# Altium PCB LM-008.PcbDoc (part 1 of 2)
Units mm, origin at the board's own origin, x right, y up, seen from the top; angles counter-clockwise.
Board outline 62 x 70.16 mm, 4 copper layers (Top Layer, +5V, Signal Layer 1, Bottom Layer), stack 0.778 mm thick; 50 components, 39 nets, 213 pads, 21 vias.
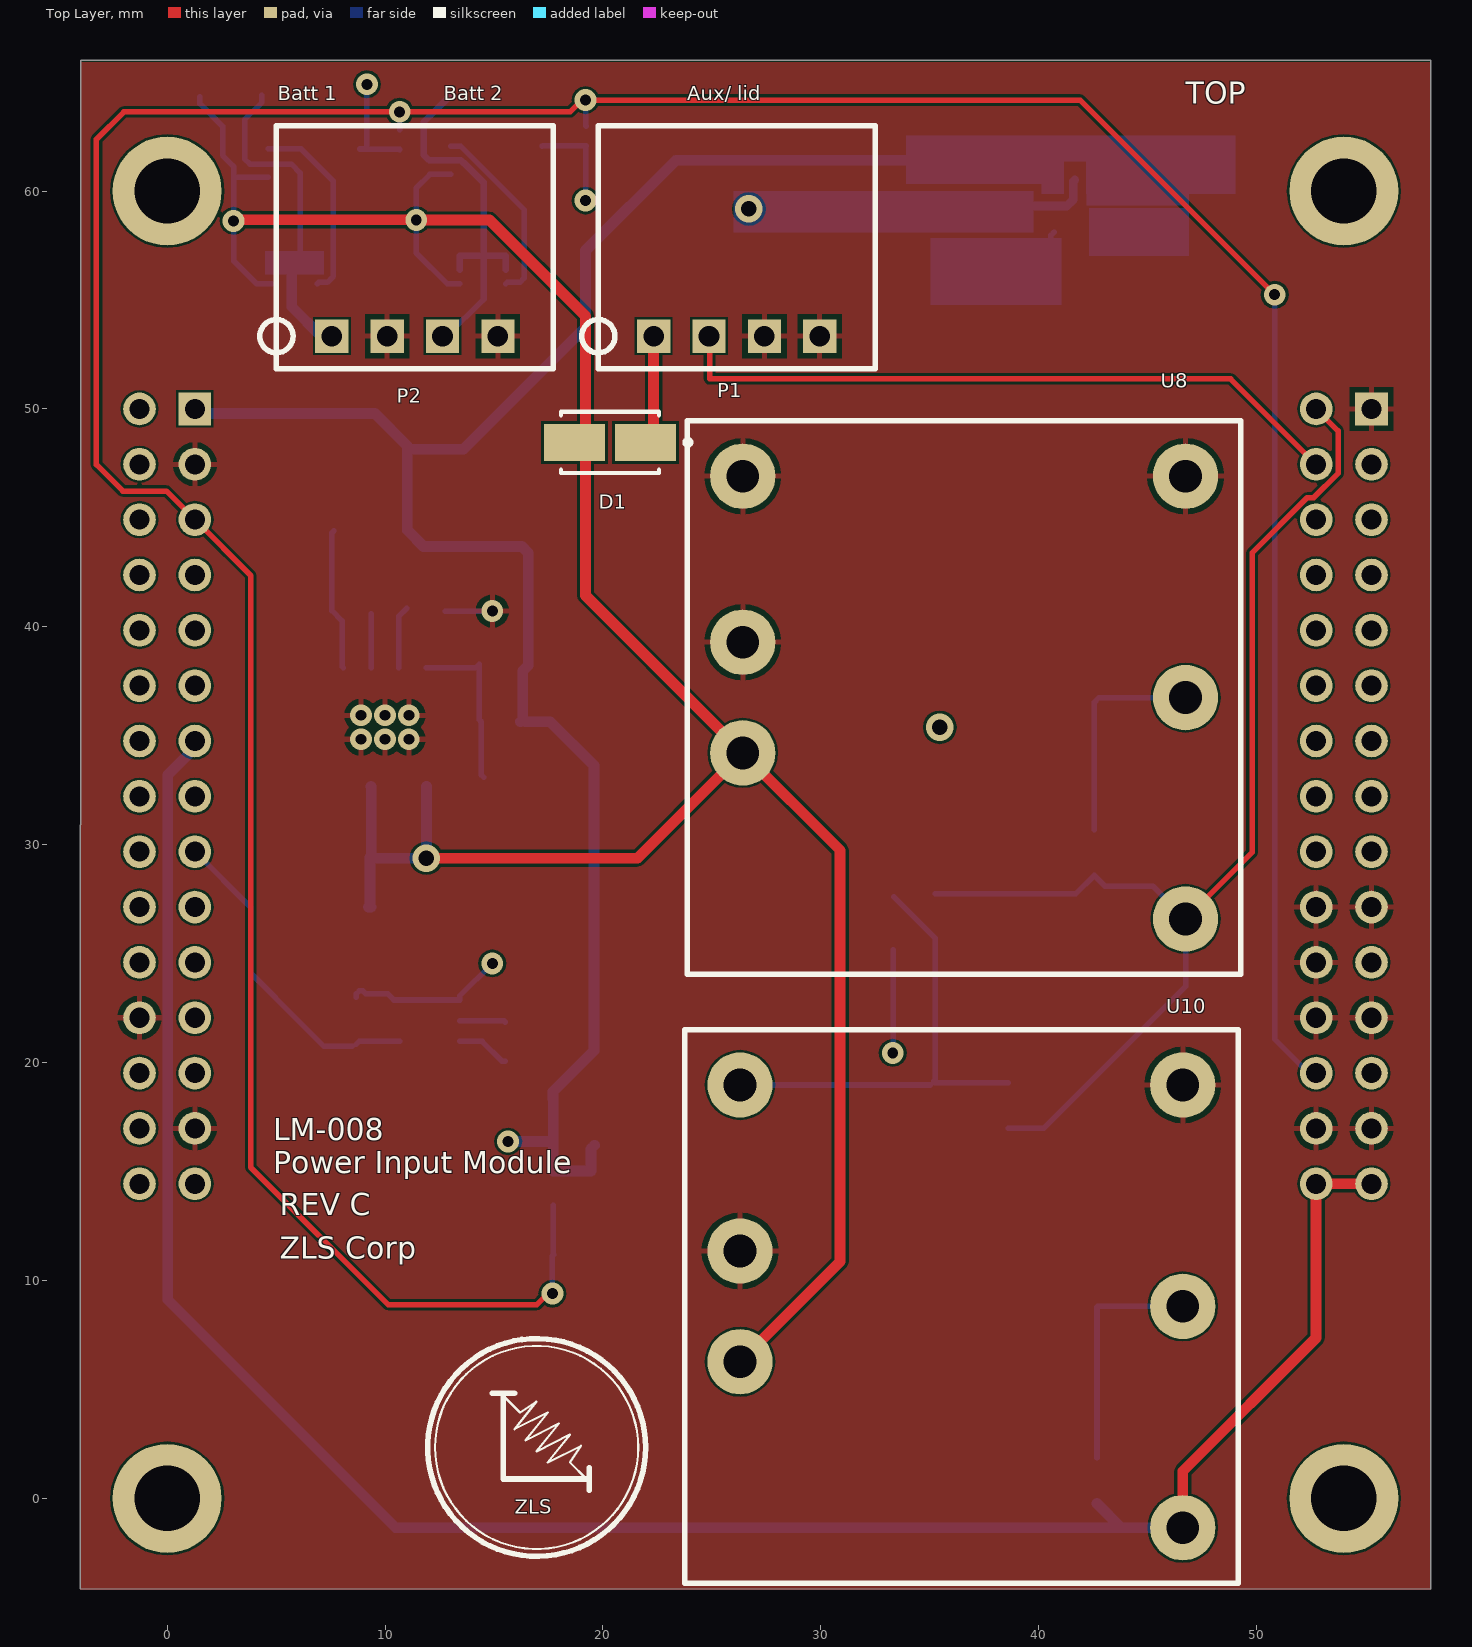
[diagram p0: Top Layer view]
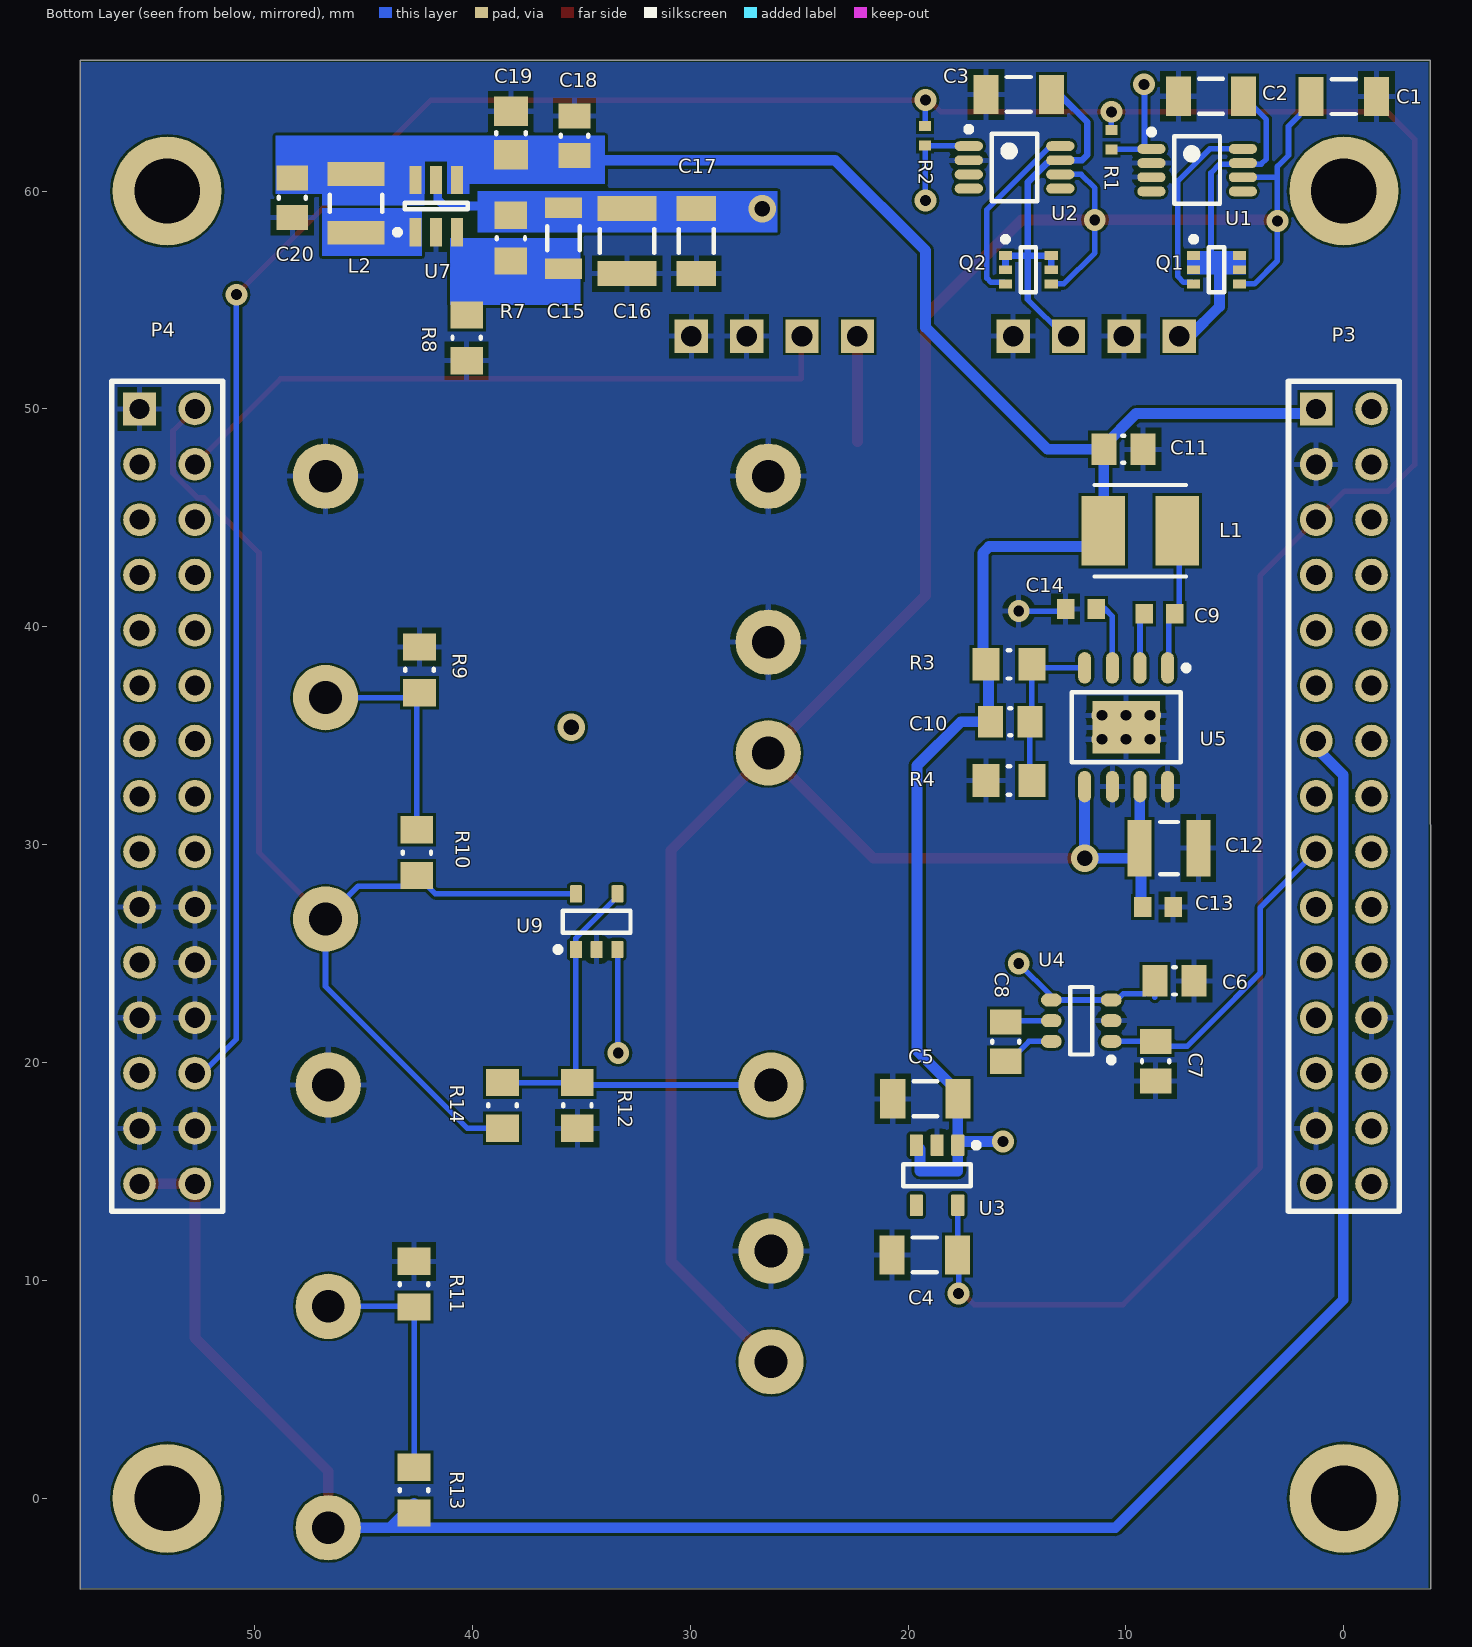
[diagram p1: Bottom Layer view, seen from below]
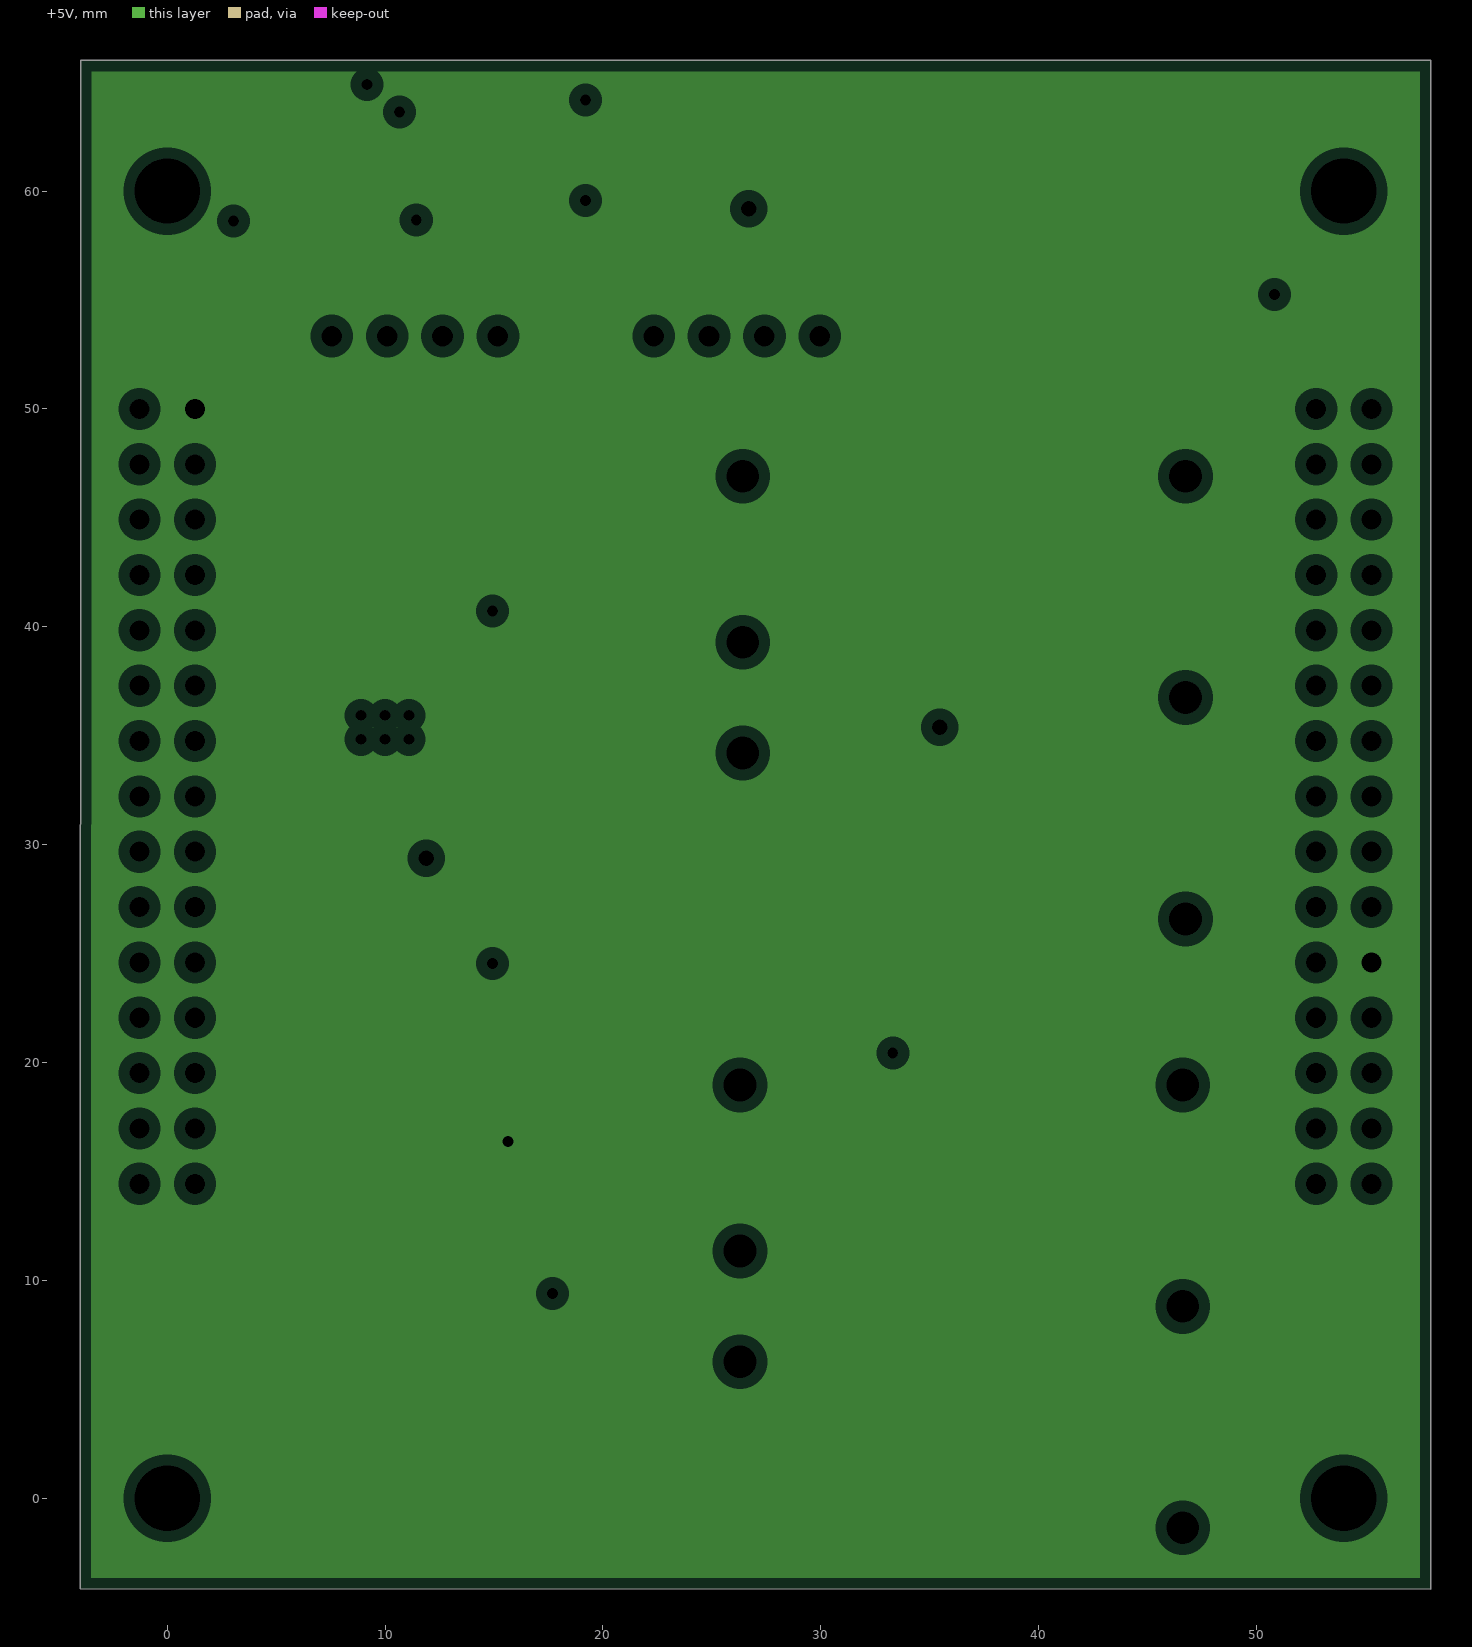
[diagram p2: +5V, clearances drawn from the general rule]
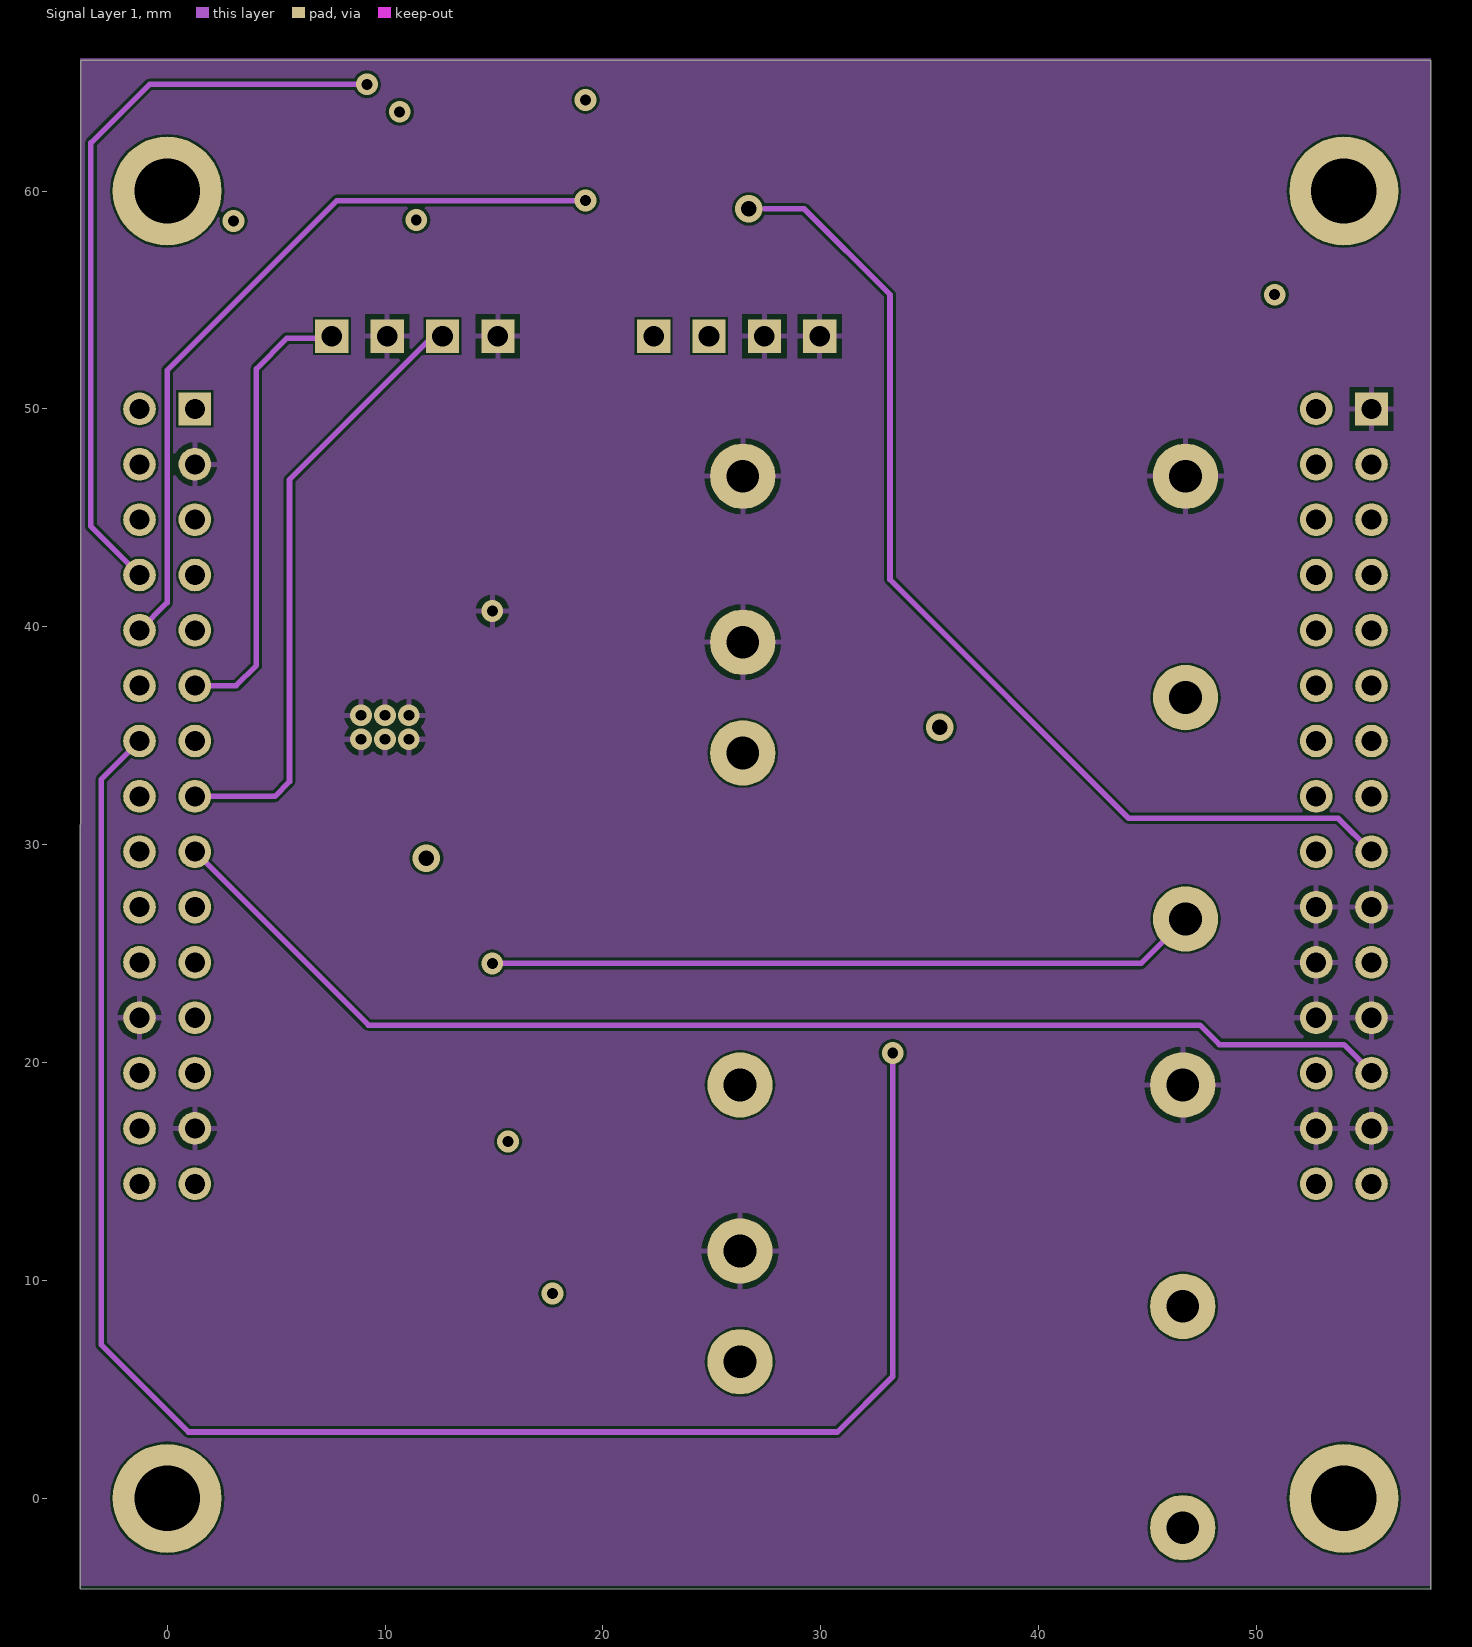
[diagram p3: Signal Layer 1]

## Layer stack, top to bottom
Top Solder: solder mask 0.0102, Solder Resist, Dk 3.5
Top Layer: signal copper 0.0356
Dielectric 1: core 0.254, FR-4, Dk 4.2
+5V: plane copper 0.036, net +5
Dielectric 3: prepreg 0.127, Dk 4.2
Signal Layer 1: signal copper 0.036
Dielectric 2: core 0.254, Dk 4.2
Bottom Layer: signal copper 0.0356
Bottom Solder: solder mask 0.0102, Solder Resist, Dk 3.5

## Board outline
-4,-4.138 58,-4.162 58,66.001 -3.975,65.999

## Design rules (kind name [scope] priority, off if disabled: settings)
Clearance [All] p1: gap=0.127 ignorepadtopadclearanceinfootprint=TRUE except(0.1: Arc-Text Arc-Hole Track-Text Track-Hole SMDPad-SMDPad SMDPad-THPad SMDPad-Via SMDPad-Text SMDPad-Hole THPad-THPad THPad-Via THPad-Fill THPad-Poly THPad-Region THPad-Text THPad-Hole Via-Text Via-Hole Fill-Text Fill-Hole Poly-Text Poly-Hole Region-Text Region-Hole Text-Text Text-Hole)
HoleSize [All] p1: absolutevalues=TRUE maxlimit=5 minlimit=0.025 maxpercent=80.000 minpercent=20.000
MinimumSolderMaskSliver [All] p1: minsoldermaskwidth=0.045
PlaneClearance [All] p1: clearance=0.508
PlaneConnect [All] p1: planeconnectstyle=Relief reliefexpansion=0.508 reliefentries=4 reliefconductorwidth=0.254 reliefairgap=0.254
PolygonConnect [All] p1: connectstyle=Relief reliefconductorwidth=0.254 reliefentries=4 polygonreliefangle="90 Angle" airgapwidth=0.254
RoutingVias [All] p1: holewidth=0.711 width=1.27 viastyle="Through Hole" minholewidth=0.711 minwidth=1.27 maxholewidth=0.711 maxwidth=1.27
SilkToSilkClearance [All] p1: silktosilkclearance=0.2
SilkToSolderMaskClearance [IsPad] p1: minsilkscreentomaskgap=0.175 clearancetoexposedcopper=TRUE
SolderMaskExpansion [All] p1: expansion=0.102
Width [All] p1: maxlimit=1 minlimit=0.254 preferedwidth=0.254
24 further rules are at their usual default settings.

## Classes and differential pairs
component class 36V_Supply: C15 C16 C17 C18 C19 C20 L2 R7 R8 U7
component class 5R_Supply.doc: C6 C7 C8 C9 C10 C11 C12 C13 C14 L1 R3 R4 R28 U4 U5
component class Power_Input: C1 C2 C3 D1 P1 P2 P? Q1 Q2 R1 R2 RL2 RL? U1 U2
component class 12V_Supply: R11 R12 R13 R14 U9 U10
component class BBB-Supply: R9 R10 R26 U8
component class LM-008: C4 C5 P3 P4 U3

## Components (designator, comment, footprint, x,y, rotation, side; value= is the part's Value field where it differs from the comment)
C1 "CAP CER 10UF 6.3V X5R 1206" CAPC1206(3216)130_N 0,64.338 r0 bottom
C2 "CAP CER 10UF 6.3V X5R 1206" CAPC1206(3216)130_N 6.096,64.351 r180 bottom
C3 "CAP CER 10UF 6.3V X5R 1206" CAPC1206(3216)130_N 14.921,64.436 r180 bottom
C4 "CAP CER 1UF 50V X7R 1210" CAPC1206(3216)130_N 19.228,11.176 r180 bottom
C5 "CAP CER 1UF 50V X7R 1210" CAPC1206(3216)130_N 19.202,18.339 r180 bottom
C6 "10uF" CAPC0805(2012)145_N 7.772,23.749 r180 bottom
C7 "10uF" CAPC0805(2012)145_N 8.636,20.062 r270 bottom
C8 "1uF" CAPC0805(2012)145_N 15.518,20.962 r270 bottom
C9 "0.68uF" 1608[0603] 8.455,40.598 r180 bottom
C10 "10pF" CAPC0805(2012)145_N 15.313,35.645 r180 bottom
C11 "10uF" CAPC0805(2012)145_N 10.117,48.149 r180 bottom
C12 "4.7uF" C1210 8.026,29.845 r0 bottom
C13 "0.1uF" 1608[0603] 8.534,27.14 r0 bottom
C14 "2.2uF" 1608[0603] 12.065,40.818 r180 bottom
C15 "22pF" CAPC1206(3216)170_L 35.814,57.836 r90 bottom
C16 "CAP CER 1UF 50V X7R 1210" CAPC1210(3225)100_N 32.893,57.709 r90 bottom
C17 "CAP CER 0.47UF 50V X7R 1206" CAPC1206(3216)190_N 29.718,57.709 r90 bottom
C18 "CAP CER 1UF 16V X7R 0805" CAPC0805(2012)145_N 35.306,62.535 r270 bottom
C19 "4.7uF" CAPC0805(2012)145_M 38.227,62.662 r270 bottom
C20 "CAP CER 0.047UF 16V X7R 0603" CAPC0805(2012)145_N 48.26,59.69 r90 bottom
D1 "CDBA540-HF" VISH-DO-214AC-2_M 20.32,48.463 r180 top
L1 "2.2uH" PA4332 9.344,44.408 r0 bottom
L2 "47uH" C1210 45.339,59.436 r270 bottom
P1 "IPL1-104-01-L-S-RA-K" IPL1-104-01-L-S-RA-K 22.326,53.34 r0 top
P2 "IPL1-104-01-L-S-RA-K" IPL1-104-01-L-S-RA-K 7.555,53.34 r0 top
P3 "SSW-115-01-F-D" SSW-115-23-G-D 1.27,50 r270 bottom locked
P4 "SSW-115-01-F-D" SSW-115-23-G-D 55.27,50 r270 bottom locked
Q1 "MCH6336-TL-E" ONSC-MCPH-6_V 5.842,56.388 r180 bottom
Q2 "MCH6336-TL-E" ONSC-MCPH-6_V 14.478,56.388 r180 bottom
R1 "560k" RESC0402(1005)_L 10.668,62.357 r90 bottom
R2 "560k" RESC0402(1005)_L 19.228,62.535 r90 bottom
R3 "88.7K" RESC0805(2012)_M 15.367,38.278 r0 bottom
R4 "22.1K" RESC0805(2012)_M 15.367,32.944 r180 bottom
R7 "RES SMD 280K OHM 1% 1/8W 0805" RESC0805(2012)_M 38.227,57.836 r270 bottom
R8 "RES SMD 10K OHM 1% 1/8W 0805" RESC0805(2012)_M 40.259,53.264 r270 bottom
R9 "DNP" RESC0805(2012)_M 42.418,38.024 r90 bottom
R10 "DNP" RESC0805(2012)_M 42.545,29.642 r90 bottom
R11 "DNP" RESC0805(2012)_M 42.672,9.83 r90 bottom
R12 "RES SMD 100K OHM 1% 1/8W 0805" RESC0805(2012)_M 35.179,18.034 r270 bottom
R13 "DNP" RESC0805(2012)_M 42.672,0.381 r90 bottom
R14 "DNP" RESC0805(2012)_M 38.608,18.034 r90 bottom
U1 "LTC4414EMS8#TRPBF" LT-MS8-8_L 6.731,60.96 r180 bottom
U2 "LTC4414EMS8#TRPBF" LT-MS8-8_L 15.113,61.087 r180 bottom
U3 "TLV70233DBVR" DBV0005A_N 18.669,14.834 r270 bottom
U4 "LM2776DBVR" LM2776DBVR 12.049,21.924 r0 bottom
U5 "LMR23625CFDDAR" LMR23625CDDAR 9.99,35.391 r270 bottom
U7 "LT3461" LT-S6-6-TSOT-23_N 41.656,59.309 r90 bottom
U8 "CCG152405S" PXB15-24WS05/NT 26.416,46.914 r0 top
U9 "OPA188AIDBVR" DBV0005A_L 34.29,26.467 r90 bottom
U10 "CCG30-24-12S" PXB15-24WD05/N 46.609,8.814 r0 top

## Footprints (in the part's own frame and the unit in brackets; to place one, negate y for a bottom-side part, rotate by r counter-clockwise, add the part's x,y. Pads: shape width x height; smd on the part's side, far side on the other; paste and mask are expansions set on the pad)
1608[0603] [mm] "Chip Capacitor, Body 1.6x0.8mm, IPC High Density"
  rect 0.8x0.9 smd: 1(-0.7,0) 2(0.7,0)
  body extent -0.87,-0.48 0.87,0.48, height 1.3
C1210 [mm] "Chip Capacitor, Body 3.2x2.5mm, IPC High Density"
  rect 1.1x2.6 smd: 1(-1.35,0) 2(1.35,0)
  silkscreen extent -0.4,-1.2 0.4,1.2, body extent -1.7,-1.35 1.7,1.35, height 1.3
CAPC0805(2012)145_M [mm] "Chip Capacitor, Body 2.0x1.2mm, Height 1.45mm, IPC Low Density"
  rect 1.35x1.55 smd: 1(-1,0) 2(1,0)
  silkscreen extent -0.05,-0.68 0.05,0.67, body extent -1.1,-0.72 1.1,0.72, height 1.45
CAPC0805(2012)145_N [mm] "Chip Capacitor, Body 2.0x1.2mm, Height 1.45mm, IPC Medium Density"
  rect 1.15x1.45 smd: 1(-0.9,0) 2(0.9,0)
  silkscreen extent -0.05,-0.62 0.05,0.62, body extent -1.1,-0.72 1.1,0.73, height 1.45
CAPC1206(3216)130_N [mm] "Chip Capacitor, Body 3.2x1.6mm, Height 1.3mm, IPC Medium Density"
  rect 1.15x1.8 smd: 1(-1.5,0) 2(1.5,0)
  silkscreen extent -0.55,-0.8 0.55,0.8, body extent -1.7,-0.9 1.7,0.9, height 1.3
CAPC1206(3216)170_L [mm] "Chip Capacitor, Body 3.2x1.6mm, Height 1.7mm, IPC High Density"
  rect 0.95x1.7 smd: 1(-1.4,0) 2(1.4,0)
  silkscreen extent -0.55,-0.75 0.55,0.75, body extent -1.7,-0.9 1.7,0.9, height 1.7
CAPC1206(3216)190_N [mm] "Chip Capacitor, Body 3.2x1.6mm, Height 1.9mm, IPC Medium Density"
  rect 1.15x1.8 smd: 1(-1.5,0) 2(1.5,0)
  silkscreen extent -0.55,-0.8 0.55,0.8, body extent -1.7,-0.9 1.7,0.9, height 1.9
CAPC1210(3225)100_N [mm] "Chip Capacitor, Body 3.2x2.5mm, Height 1mm, IPC Medium Density"
  rect 1.15x2.7 smd: 1(-1.5,0) 2(1.5,0)
  silkscreen extent -0.55,-1.25 0.55,1.25, body extent -1.7,-1.35 1.7,1.35, height 1
DBV0005A_L [mm] "SOT23, 5-Leads, Body 3.05x1.75mm, Pitch 0.95mm, IPC High Density"
  rrect18% 0.8x0.55 smd: 1(-1.275,0.95) 2(-1.275,0) 3(-1.275,-0.95) 4(1.275,-0.95) 5(1.275,0.95)
  silkscreen extent -1.4,-1.55 0.5,1.9, body extent -1.42,-1.46 1.42,1.46, height 1.08
DBV0005A_N [mm] "SOT23, 5-Leads, Body 3.05x1.75mm, Pitch 0.95mm, IPC Medium Density"
  rrect17% 1x0.6 smd: 1(-1.375,0.95) 2(-1.375,0) 3(-1.375,-0.95) 4(1.375,-0.95) 5(1.375,0.95)
  silkscreen extent -1.5,-1.55 0.5,1.92, body extent -1.42,-1.46 1.42,1.46, height 1.08
IPL1-104-01-L-S-RA-K [mil]
  rect 60x60 hole 37.4: 1(0,0) 2(100,0) 3(200,0) 4(300,0)
  silkscreen extent -130,-59 400,380, body extent -80,-12 380,380, height 258
LM2776DBVR [mm]
  oval 0.95x0.6 smd: 1(-1.375,0.95) 2(-1.375,0) 3(-1.375,-0.95) 4(1.375,-0.95) 5(1.375,0) 6(1.375,0.95)
  silkscreen extent -1.5,-1.55 0.5,1.92, body extent -1.39,-1.55 1.39,1.55, height 1.45
LMR23625CDDAR [mm] "IC REG BUCK ADJ 2.5A SYNC 8SOPWR"
  oval 1.45x0.6 smd: 1(-2.725,1.905) 2(-2.725,0.635) 3(-2.725,-0.635) 4(-2.725,-1.905) 5(2.725,-1.905) 6(2.725,-0.635) 7(2.725,0.635) 8(2.725,1.905)
  rect 2.4x3.1 smd: 9(0,0)
  silkscreen extent -2.85,-2.5 1.6,2.88, body extent -3,-2.5 3,2.5, height 1.7
LT-MS8-8_L [mm] "SOP, 8-Leads, Body 3.1x3.1mm, Pitch 0.65mm, IPC High Density"
  oval 1.3x0.45 smd: 1(-2.1,0.975) 2(-2.1,0.325) 3(-2.1,-0.325) 4(-2.1,-0.975) 5(2.1,-0.975) 6(2.1,-0.325) 7(2.1,0.325) 8(2.1,0.975)
  silkscreen extent -2.23,-1.55 1.05,1.87, body extent -1.55,-1.55 1.55,1.55, height 1.1
LT-S6-6-TSOT-23_N [mm] "SOT23, 6-Leads, Body 2.9x1.75mm, Pitch 0.95mm, IPC Medium Density"
  rect 1.3x0.55 smd: 1(-1.2,0.95) 2(-1.2,0) 3(-1.2,-0.95) 4(1.2,-0.95) 5(1.2,0) 6(1.2,0.95)
  silkscreen extent -1.32,-1.45 0.15,1.9, body extent -0.87,-1.45 0.87,1.45, height 1
ONSC-MCPH-6_V [mm] "SOT23, 6-Leads, Body 2x1.6mm, Pitch 0.65mm"
  rect 0.6x0.4 smd: 1(-1.05,0.65) 2(-1.05,0) 3(-1.05,-0.65) 4(1.05,-0.65) 5(1.05,0) 6(1.05,0.65)
  silkscreen extent -1.18,-1.03 0.35,1.52, body extent -0.8,-1 0.8,1, height 0.9
PA4332 [mm] "Precision Wire Wound Inductor, 2-Leads, Body 4.10x3.65mm, IPC Medium Density"
  rect 2x3.2 smd: 1(-1.7,0) 2(1.7,0)
  silkscreen extent -2.1,-2.1 2.1,2.1, body extent -2.15,-1.83 2.15,1.82, height 2.1
PXB15-24WD05/N [mm] "DC-DC CONV 15W DUAL 5V"
  round 3 hole 1.5: 1(-20.32,10.16) 2(-20.32,2.54) 3(-20.32,-2.54) 4(0,-10.16) 5(0,0) 6(0,10.16)
  silkscreen extent -22.86,-12.7 2.54,12.7, body extent -22.99,-12.83 2.67,12.83, height 9.9
PXB15-24WS05/NT [mm] "DC-DC Converter 5V 3A 15W"
  round 3 hole 1.5: 1(0,0) 2(0,-7.62) 3(0,-12.7) 4(20.32,-20.32) 5(20.32,-10.16) 6(20.32,0)
  silkscreen extent -2.54,-22.86 22.86,2.54, body extent -2.67,-22.99 22.99,2.67, height 9.9
RESC0402(1005)_L [mm] "Chip Resistor, Body 1.0x0.5mm, IPC High Density"
  rect 0.45x0.55 smd: 1(-0.45,0) 2(0.45,0)
  body extent -0.52,-0.27 0.53,0.28, height 0.4
RESC0805(2012)_M [mm] "Chip Resistor, Body 2.0x1.3mm, IPC Low Density"
  rect 1.25x1.5 smd: 1(-1.05,0) 2(1.05,0)
  silkscreen extent -0.05,-0.65 0.05,0.65, body extent -1.1,-0.67 1.1,0.67, height 0.7
SSW-115-23-G-D [mm]
  rect 1.5x1.5 hole 0.92: 1(0,0)
  round 1.5 hole 0.92: 2(0,2.54) 3(2.54,0) 4(2.54,2.54) 5(5.08,0) 6(5.08,2.54) 7(7.62,0) 8(7.62,2.54) 9(10.16,0) 10(10.16,2.54) 11(12.7,0) 12(12.7,2.54) 13(15.24,0) 14(15.24,2.54) 15(17.78,0) 16(17.78,2.54) 17(20.32,0) 18(20.32,2.54) 19(22.86,0) 20(22.86,2.54) 21(25.4,0) 22(25.4,2.54) 23(27.94,0) 24(27.94,2.54) 25(30.48,0) 26(30.48,2.54) 27(33.02,0) 28(33.02,2.54) 29(35.56,0) 30(35.56,2.54)
  silkscreen extent -1.27,-1.27 36.83,3.81, body extent -1.52,-1.27 37.08,3.68, height 8.51
VISH-DO-214AC-2_M [mm] "DO-214AC, 2-Leads, Body 4.5x2.79mm, IPC Low Density"
  rect 2.8x1.7 smd: 1(-1.625,0) 2(1.625,0)
  silkscreen extent -3.7,-1.4 2.25,1.4, body extent -2.25,-1.39 2.25,1.4, height 2.29

## Part data
C1: library part CMP-1037-04913-1, Capacitance=22pF, Manufacturer="Taiyo Yuden", Manufacturer Part Number=JMK316BJ106ML-T, Operating Temperature="-55°C ~ 85°C", Package / Case="1206 (3216 Metric)", Ratings=-, Supplier Part Number 1=587-5447-1-ND, Temperature Coefficient=X5R, Tolerance=±20%, Voltage - Rated=6.3V, Applications="SMPS Filtering", Category=Capacitors, ComponentLink1Description=http://ds.yuden.co.jp/TYCOMPAS/ut/detail.do?productNo=JMK316BJ106ML-T&fileName=JMK316BJ106ML-T_SS&mode=specSheetDownload, ComponentLink1URL=http://ds.yuden.co.jp/TYCOMPAS/ut/detail.do?productNo=JMK316BJ106ML-T&fileName=JMK316BJ106ML-T_SS&mode=specSheetDownload, Failure Rate=-, Features=-, Height - Seated (Max)=-, Lead Spacing=-, Lead Style=-, Mounting Type="Surface Mount, MLCC", Notification="Current market demand for these product types have resulted in fluctuating and extending lead times. Lead times may differ.", Packaging="Cut Tape (CT)", Part Status=Active, Pricing 1="1=0.24, 10=0.161, 100=0.0817, 500=0.05592, 1000=0.04946 (USD)", RoHS="RoHS Compliant", Size / Dimension="0.126\" L x 0.063\" W (3.20mm x 1.60mm)", Stock 1=5600, Supplier 1=Digi-Key, Thickness (Max)="0.071\" (1.80mm)"
C2 C3: library part CMP-1037-04913-1, Capacitance=.1uF, Manufacturer="Taiyo Yuden", Manufacturer Part Number=JMK316BJ106ML-T, Operating Temperature="-55°C ~ 85°C", Package / Case="1206 (3216 Metric)", Ratings=-, Supplier Part Number 1=587-5447-1-ND, Temperature Coefficient=X5R, Tolerance=±20%, Voltage - Rated=6.3V, Applications="SMPS Filtering", Category=Capacitors, ComponentLink1Description=http://ds.yuden.co.jp/TYCOMPAS/ut/detail.do?productNo=JMK316BJ106ML-T&fileName=JMK316BJ106ML-T_SS&mode=specSheetDownload, ComponentLink1URL=http://ds.yuden.co.jp/TYCOMPAS/ut/detail.do?productNo=JMK316BJ106ML-T&fileName=JMK316BJ106ML-T_SS&mode=specSheetDownload, Failure Rate=-, Features=-, Height - Seated (Max)=-, Lead Spacing=-, Lead Style=-, Mounting Type="Surface Mount, MLCC", Notification="Current market demand for these product types have resulted in fluctuating and extending lead times. Lead times may differ.", Packaging="Cut Tape (CT)", Part Status=Active, Pricing 1="1=0.24, 10=0.161, 100=0.0817, 500=0.05592, 1000=0.04946 (USD)", RoHS="RoHS Compliant", Size / Dimension="0.126\" L x 0.063\" W (3.20mm x 1.60mm)", Stock 1=5600, Supplier 1=Digi-Key, Thickness (Max)="0.071\" (1.80mm)"
C4 C5: library part CMP-1037-04913-1, Capacitance=1µF, Manufacturer="Murata Electronics North America", Manufacturer Part Number=GRM32RR71H105KA01L, Operating Temperature="-55°C ~ 125°C", Package / Case="1210 (3225 Metric)", Ratings=-, Supplier Part Number 1=490-1863-6-ND, Temperature Coefficient=X7R, Tolerance=±10%, Voltage - Rated=50V, Applications="General Purpose", Category=Capacitors, ComponentLink1Description=http://search.murata.co.jp/Ceramy/image/img/A01X/G101/ENG/GRM32RR71H105KA01-01.pdf, ComponentLink1URL=http://search.murata.co.jp/Ceramy/image/img/A01X/G101/ENG/GRM32RR71H105KA01-01.pdf, Features=-, Height - Seated (Max)=-, Lead Spacing=-, Lead Style=-, Mounting Type="Surface Mount, MLCC", Packaging=Digi-Reel®, Part Status=Active, Pricing 1="1=0.35, 10=0.242, 100=0.1449, 500=0.10868 (USD)", RoHS="RoHS Compliant", Size / Dimension="0.126\" L x 0.098\" W (3.20mm x 2.50mm)", Stock 1=66890, Supplier 1=Digi-Key, Thickness (Max)="0.079\" (2.00mm)"
C6 C7 C11: library part CMP-1036-04795-1, "CAP CER 10UF 16V X6S 0805", Manufacturer="TDK Corporation", Manufacturer Part Number=C2012X6S1C106K085AC, Operating Temperature="-55°C ~ 105°C", Package / Case="0805 (2012 Metric)", Ratings=-, Supplier Part Number 1=445-14483-6-ND, Temperature Coefficient=X6S, Tolerance=±10%, Voltage - Rated=16V, Applications="General Purpose", Category=Capacitors, ComponentLink1Description=https://product.tdk.com/info/en/catalog/datasheets/mlcc_commercial_general_en.pdf, ComponentLink1URL=https://product.tdk.com/info/en/catalog/datasheets/mlcc_commercial_general_en.pdf, Failure Rate=-, Features="Low ESL", Height - Seated (Max)=-, Lead Spacing=-, Lead Style=-, Mounting Type="Surface Mount, MLCC", Notification="Current market demand for these product types have resulted in fluctuating and extending lead times. Lead times may differ.", Packaging=Digi-Reel®, Part Status=Active, Pricing 1="1=0.38, 10=0.259, 100=0.1466, 500=0.1035, 1000=0.09056 (USD)", RoHS="RoHS Compliant", Size / Dimension="0.079\" L x 0.049\" W (2.00mm x 1.25mm)", Stock 1=0, Supplier 1=Digi-Key, Thickness (Max)="0.039\" (1.00mm)"
C8: library part CMP-1036-04795-1, "CAP CER 1UF 25V X7R 0805", Manufacturer=Yageo, Manufacturer Part Number=CC0805KKX7R6BB105, Operating Temperature="-55°C ~ 125°C", Package / Case="0805 (2012 Metric)", Ratings=-, Supplier Part Number 1=311-1458-6-ND, Temperature Coefficient=X7R, Tolerance=±10%, Voltage - Rated=10V, Applications="General Purpose", Category=Capacitors, ComponentLink1Description=http://www.yageo.com/documents/recent/UPY-GPHC_X7R_6.3V-to-50V_18.pdf, ComponentLink1URL=http://www.yageo.com/documents/recent/UPY-GPHC_X7R_6.3V-to-50V_18.pdf, Failure Rate=-, Features=-, Height - Seated (Max)=-, Lead Spacing=-, Lead Style=-, Mounting Type="Surface Mount, MLCC", Notification="Current market demand for these product types have resulted in fluctuating and extending lead times. Lead times may differ.", Packaging=Digi-Reel®, Part Status=Active, Pricing 1="1=0.25, 10=0.168, 100=0.0852, 500=0.0583, 1000=0.05158 (USD)", RoHS="RoHS Compliant", Size / Dimension="0.079\" L x 0.049\" W (2.00mm x 1.25mm)", Stock 1=30000, Supplier 1=Digi-Key, Thickness (Max)="0.057\" (1.45mm)"
C9: library part "Cap Semi", "CAP CER 0.68UF 50V X5R 0603", Manufacturer="TDK Corporation", Manufacturer Part Number=C1608X5R1H684K080AB, Operating Temperature="-55°C ~ 85°C", Package / Case="0603 (1608 Metric)", Ratings=-, Supplier Part Number 1=445-7466-6-ND, Temperature Coefficient=X5R, Tolerance=±10%, Voltage - Rated=50V, Applications="General Purpose", Category=Capacitors, ComponentLink1Description=https://product.tdk.com/info/en/catalog/datasheets/mlcc_commercial_general_en.pdf, ComponentLink1URL=https://product.tdk.com/info/en/catalog/datasheets/mlcc_commercial_general_en.pdf, Failure Rate=-, Features="Low ESL", Height - Seated (Max)=-, Lead Spacing=-, Lead Style=-, Mounting Type="Surface Mount, MLCC", Notification="Current market demand for these product types have resulted in fluctuating and extending lead times. Lead times may differ.", Packaging=Digi-Reel®, Part Status="Not For New Designs", Pricing 1="1=0.24, 10=0.162, 100=0.0819, 500=0.05606, 1000=0.04959 (USD)", RoHS="RoHS Compliant", Size / Dimension="0.063\" L x 0.032\" W (1.60mm x 0.80mm)", Stock 1=40000, Supplier 1=Digi-Key, Thickness (Max)="0.035\" (0.90mm)"
C10: library part CMP-1036-04795-1, "CAP CER 10PF 16V C0G/NP0 0805", Manufacturer=KEMET, Manufacturer Part Number=C0805C100M4GACTU, Operating Temperature="-55°C ~ 125°C", Package / Case="0805 (2012 Metric)", Ratings=-, Supplier Part Number 1=399-9147-6-ND, Temperature Coefficient="C0G, NP0", Tolerance=±20%, Voltage - Rated=16V, Applications="General Purpose", Category=Capacitors, ComponentLink1Description=https://api.kemet.com/component-edge/download/datasheet/C0805C100M4GACTU.pdf, ComponentLink1URL=https://api.kemet.com/component-edge/download/datasheet/C0805C100M4GACTU.pdf, Failure Rate=-, Features="Low ESL", Height - Seated (Max)=-, Lead Spacing=-, Lead Style=-, Mounting Type="Surface Mount, MLCC", Notification="Current market demand for these product types have resulted in fluctuating and extending lead times. Lead times may differ.", Packaging=Digi-Reel®, Part Status=Active, Pricing 1="1=0.13, 10=0.092, 100=0.0409, 500=0.02918, 1000=0.02293 (USD)", RoHS="RoHS Compliant", Size / Dimension="0.079\" L x 0.049\" W (2.00mm x 1.25mm)", Stock 1=7637, Supplier 1=Digi-Key, Thickness (Max)="0.035\" (0.88mm)"
C12: library part "Cap Semi", "CAP CER 4.7UF 50V X7R 1210", Manufacturer="Murata Electronics North America", Manufacturer Part Number=GRM32ER71H475KA88L, Operating Temperature="-55°C ~ 125°C", Package / Case="1210 (3225 Metric)", Ratings=-, Supplier Part Number 1=490-1864-6-ND, Temperature Coefficient=X7R, Tolerance=±10%, Voltage - Rated=50V, Applications="General Purpose", Category=Capacitors, ComponentLink1Description=https://www.murata.com/~/media/webrenewal/support/library/catalog/products/capacitor/mlcc/c02e.ashx?la=en-us, ComponentLink1URL=https://www.murata.com/~/media/webrenewal/support/library/catalog/products/capacitor/mlcc/c02e.ashx?la=en-us, Features=-, Height - Seated (Max)=-, LatestRevisionDate=29-May-2009, LatestRevisionNote="IPC-7351 Footprint Added.", Lead Spacing=-, Lead Style=-, Mounting Type="Surface Mount, MLCC", Notification="Current market demand for these product types have resulted in fluctuating and extending lead times. Lead times may differ.", PackageDescription="Chip Capacitor", PackageReference=C1206, Packaging=Digi-Reel®, Part Status="Not For New Designs", Pricing 1="1=1.66, 10=1.313, 100=0.9849, 500=0.74414 (USD)", Published=8-Jun-2000, Publisher="Altium Limited", RoHS="RoHS Compliant", Size / Dimension="0.126\" L x 0.098\" W (3.20mm x 2.50mm)", Stock 1=10000, Supplier 1=Digi-Key, Thickness (Max)="0.106\" (2.70mm)"
C13: library part "Cap Semi", "CAP CER 0.1UF 50V X5R 0603", Manufacturer="TDK Corporation", Manufacturer Part Number=C1608X5R1H104K080AA, Operating Temperature="-55°C ~ 85°C", Package / Case="0603 (1608 Metric)", Ratings=-, Supplier Part Number 1=445-7456-6-ND, Temperature Coefficient=X5R, Tolerance=±10%, Voltage - Rated=50V, Applications="General Purpose", Category=Capacitors, ComponentLink1Description=https://product.tdk.com/info/en/catalog/datasheets/mlcc_commercial_general_en.pdf, ComponentLink1URL=https://product.tdk.com/info/en/catalog/datasheets/mlcc_commercial_general_en.pdf, Failure Rate=-, Features="Low ESL", Height - Seated (Max)=-, Lead Spacing=-, Lead Style=-, Mounting Type="Surface Mount, MLCC", Notification="Current market demand for these product types have resulted in fluctuating and extending lead times. Lead times may differ.", Packaging=Digi-Reel®, Part Status="Not For New Designs", Pricing 1="1=0.1, 10=0.074, 100=0.0331, 500=0.02366, 1000=0.0186 (USD)", RoHS="RoHS Compliant", Size / Dimension="0.063\" L x 0.032\" W (1.60mm x 0.80mm)", Stock 1=0, Supplier 1=Digi-Key, Thickness (Max)="0.035\" (0.90mm)"
C14: library part "Cap Semi", "CAP CER 2.2UF 10V X7R 0603"
C15: library part CMP-1037-04573-1, "CAP CER 22PF 50V C0G/NP0 1206", Manufacturer=KEMET, Manufacturer Part Number=C1206C220K5GACTU, Operating Temperature="-55°C ~ 125°C", Package / Case="1206 (3216 Metric)", Ratings=-, Supplier Part Number 1=399-8165-1-ND, Temperature Coefficient="C0G, NP0", Tolerance=±10%, Voltage - Rated=50V, Applications="General Purpose", Category=Capacitors, ComponentLink1Description=http://www.kemet.com/docfinder?Partnumber=C1206C220K2GACTU, ComponentLink1URL=http://www.kemet.com/docfinder?Partnumber=C1206C220K2GACTU, Failure Rate=-, Features="Low ESL", Height - Seated (Max)=-, Lead Spacing=-, Lead Style=-, Mounting Type="Surface Mount, MLCC", Packaging="Cut Tape (CT)", Part Status=Active, Pricing 1="1=0.18, 10=0.128, 100=0.06, 500=0.04208, 1000=0.03483 (USD)", RoHS="RoHS Compliant", Size / Dimension="0.126\" L x 0.063\" W (3.20mm x 1.60mm)", Stock 1=35613, Supplier 1=Digi-Key, Thickness (Max)="0.035\" (0.88mm)"
C16: library part CMP-1038-01123-1, Capacitance=1µF, Manufacturer="Taiyo Yuden", Manufacturer Part Number=UMK325B7105KH-T, Operating Temperature="-55°C ~ 125°C", Package / Case="1210 (3225 Metric)", Ratings=-, Supplier Part Number 1=587-1366-1-ND, Temperature Coefficient=X7R, Tolerance=±10%, Voltage - Rated=50V, Applications="General Purpose", Category=Capacitors, ComponentLink1Description=http://www.yuden.co.jp/productdata/catalog/en/mlcc_all_e.pdf, ComponentLink1URL=http://www.yuden.co.jp/productdata/catalog/en/mlcc_all_e.pdf, Features=-, Height - Seated (Max)=-, Lead Spacing=-, Lead Style=-, Mounting Type="Surface Mount, MLCC", Packaging="Cut Tape (CT)", Part Status=Active, Pricing 1="1=0.36, 10=0.247, 100=0.1398, 500=0.0987, 1000=0.08637 (USD)", RoHS="RoHS Compliant", Size / Dimension="0.126\" L x 0.098\" W (3.20mm x 2.50mm)", Stock 1=23864, Supplier 1=Digi-Key, Thickness (Max)="0.063\" (1.60mm)"
C17: library part CMP-1037-04570-1, Capacitance=0.47µF, Manufacturer="Taiyo Yuden", Manufacturer Part Number=UMK316B7474KL-T, Operating Temperature="-55°C ~ 125°C", Package / Case="1206 (3216 Metric)", Ratings=-, Supplier Part Number 1=587-1325-1-ND, Temperature Coefficient=X7R, Tolerance=±10%, Voltage - Rated=50V, Applications="General Purpose", Category=Capacitors, ComponentLink1Description=http://www.yuden.co.jp/productdata/catalog/en/mlcc_all_e.pdf, ComponentLink1URL=http://www.yuden.co.jp/productdata/catalog/en/mlcc_all_e.pdf, Features=-, Height - Seated (Max)=-, Lead Spacing=-, Lead Style=-, Mounting Type="Surface Mount, MLCC", Packaging="Cut Tape (CT)", Part Status=Active, Pricing 1="1=0.3, 10=0.203, 100=0.115, 500=0.08114, 1000=0.071 (USD)", RoHS="RoHS Compliant", Size / Dimension="0.126\" L x 0.063\" W (3.20mm x 1.60mm)", Stock 1=8658, Supplier 1=Digi-Key, Thickness (Max)="0.071\" (1.80mm)"
C18: library part CMP-1036-04795-1, Capacitance=1µF, Manufacturer="Taiyo Yuden", Manufacturer Part Number=EMK212B7105KG-T, Operating Temperature="-55°C ~ 125°C", Package / Case="0805 (2012 Metric)", Ratings=-, Supplier Part Number 1=587-1283-1-ND, Temperature Coefficient=X7R, Tolerance=±10%, Voltage - Rated=16V, Applications="General Purpose", Category=Capacitors, ComponentLink1Description=http://ds.yuden.co.jp/TYCOMPAS/ut/detail.do?productNo=EMK212B7105KG-T&fileName=EMK212B7105KG-T_SS&mode=specSheetDownload, ComponentLink1URL=http://ds.yuden.co.jp/TYCOMPAS/ut/detail.do?productNo=EMK212B7105KG-T&fileName=EMK212B7105KG-T_SS&mode=specSheetDownload, Features=-, Height - Seated (Max)=-, Lead Spacing=-, Lead Style=-, Mounting Type="Surface Mount, MLCC", Packaging="Cut Tape (CT)", Part Status=Active, Pricing 1="1=0.13, 10=0.089, 100=0.042, 1000=0.02439 (USD)", RoHS="RoHS Compliant", Size / Dimension="0.079\" L x 0.049\" W (2.00mm x 1.25mm)", Stock 1=41495, Supplier 1=Digi-Key, Thickness (Max)="0.053\" (1.35mm)"
C19: library part CMP-1036-04750-1, "CAP CER 4.7UF 16V X7R 0805", Manufacturer=KEMET, Manufacturer Part Number=C0805C475K4RACTU, Operating Temperature="-55°C ~ 125°C", Package / Case="0805 (2012 Metric)", Ratings=-, Supplier Part Number 1=399-7415-1-ND, Temperature Coefficient=X7R, Tolerance=±10%, Voltage - Rated=16V, Applications="General Purpose", Category=Capacitors, ComponentLink1Description=http://www.kemet.com/docfinder?Partnumber=C0805C475K4RACTU, ComponentLink1URL=http://www.kemet.com/docfinder?Partnumber=C0805C475K4RACTU, Failure Rate=-, Features="Low ESL", Height - Seated (Max)=-, Lead Spacing=-, Lead Style=-, Mounting Type="Surface Mount, MLCC", Packaging="Cut Tape (CT)", Part Status=Active, Pricing 1="1=0.26, 10=0.176, 100=0.0894, 500=0.06118, 1000=0.05412 (USD)", RoHS="RoHS Compliant", Size / Dimension="0.079\" L x 0.049\" W (2.00mm x 1.25mm)", Stock 1=88820, Supplier 1=Digi-Key, Thickness (Max)="0.055\" (1.40mm)"
C20: library part CMP-1036-04795-1, Capacitance=0.047µF, Manufacturer="Murata Electronics North America", Manufacturer Part Number=GRM188R71C473KA01D, Operating Temperature="-55°C ~ 125°C", Package / Case="0603 (1608 Metric)", Ratings=-, Supplier Part Number 1=490-1529-6-ND, Temperature Coefficient=X7R, Tolerance=±10%, Voltage - Rated=16V, Applications="General Purpose", Category=Capacitors, ComponentLink1Description=http://www.murata.com/~/media/webrenewal/support/library/catalog/products/capacitor/mlcc/c02e.ashx, ComponentLink1URL=http://www.murata.com/~/media/webrenewal/support/library/catalog/products/capacitor/mlcc/c02e.ashx, Features=-, Height - Seated (Max)=-, Lead Spacing=-, Lead Style=-, Mounting Type="Surface Mount, MLCC", Packaging=Digi-Reel®, Part Status=Active, Pricing 1="1=0.1, 10=0.046, 100=0.0206, 500=0.0147, 1000=0.01155 (USD)", RoHS="RoHS Compliant", Size / Dimension="0.063\" L x 0.031\" W (1.60mm x 0.80mm)", Stock 1=26, Supplier 1=Digi-Key, Thickness (Max)="0.035\" (0.90mm)"
D1: library part "D Schottky", "DIODE SCHOTTKY 40V 5A DO214AB", Capacitance @ Vr, F="380pF @ 4V, 1MHz", Current - Average Rectified (Io)=5A, Manufacturer="Comchip Technology", Operating Temperature - Junction="-50°C ~ 150°C", Package / Case="DO-214AC, SMA", Supplier Device Package="DO-214AC (SMA)", Supplier Part Number 1=641-1707-6-ND, Category="Discrete Semiconductor Products", ComponentLink1Description=http://www.comchiptech.com/cms/UserFiles/CDBA540-HF%20Thru505315.%20CDBA5200-HF%20RevC.pdf, ComponentLink1URL=http://www.comchiptech.com/cms/UserFiles/CDBA540-HF%20Thru505315.%20CDBA5200-HF%20RevC.pdf, Diode Type=Schottky, Manufacturer Part Number=CDBA540-HF, Mounting Type="Surface Mount", Packaging=Digi-Reel®, Part Status=Active, Pricing 1="1=0.49, 10=0.381, 25=0.3208, 100=0.2612, 250=0.2164, 500=0.1791, 1000=0.13432, 2500=0.12313 (USD)", RoHS="RoHS Compliant", Speed="Fast Recovery =< 500ns, > 200mA (Io)", Stock 1=7367, Supplier 1=Digi-Key
L1: library part Inductor, "FIXED IND 2.2UH 4.3A 48 MOHM SMD", Current - Saturation=6.1A, DC Resistance (DCR)="48 mOhm Max", Frequency - Self Resonant=25MHz, Manufacturer="Pulse Electronics Power", Manufacturer Part Number=PA4332.222NLT, Operating Temperature="-40°C ~ 125°C", Package / Case=Nonstandard, Q @ Freq=-, Supplier Part Number 1=553-3290-6-ND, Tolerance=±20%, Category="Inductors, Coils, Chokes", ComponentLink1Description=http://products.pulseelex.com/files/product_files/P761.pdf, ComponentLink1URL=http://products.pulseelex.com/files/product_files/P761.pdf, Features=-, Height - Seated (Max)="0.079\" (2.00mm)", Material - Core=Iron, Mounting Type="Surface Mount", Packaging=Digi-Reel®, Part Status=Active, Pricing 1="1=0.64, 10=0.564, 100=0.4025, 500=0.3381, 1000=0.2737 (USD)", Ratings=-, RoHS="RoHS Compliant", Shielding=Shielded, Size / Dimension="0.165\" L x 0.165\" W (4.20mm x 4.20mm)", Stock 1=4798, Supplier 1=Digi-Key, Supplier Device Package=-, Type=Wirewound
L2: library part Inductor, "FIXED IND 47UH 170MA 1.3 OHM SMD", DC Resistance (DCR)="1.69 Ohm Max", Manufacturer="Murata Electronics North America", Manufacturer Part Number=LQH32CN470K23L, Operating Temperature="-40°C ~ 85°C", Package / Case=Nonstandard, Q @ Freq=-, Supplier Device Package=1210, Supplier Part Number 1=490-2497-1-ND, Tolerance=±10%, Category="Inductors, Coils, Chokes", ComponentLink1Description=http://search.murata.co.jp/Ceramy/image/img/P02/JELF243A-0039.pdf, ComponentLink1URL=http://search.murata.co.jp/Ceramy/image/img/P02/JELF243A-0039.pdf, Height - Seated (Max)="0.067\" (1.70mm)", Material - Core=Ferrite, Mounting Type="Surface Mount", Packaging="Cut Tape (CT)", Part Status=Active, Pricing 1="1=0.33, 10=0.297, 100=0.2043, 500=0.17458, 1000=0.13372 (USD)", Ratings=-, RoHS="RoHS Compliant", Shielding=Unshielded, Size / Dimension="0.126\" L x 0.098\" W (3.20mm x 2.50mm)", Stock 1=1058, Supplier 1=Digi-Key, Type=Wirewound
P1 P2: Current Rating=-, Insulation Color=Natural, Manufacturer="Samtec Inc.", Material Flammability Rating="UL94 V-0", Operating Temperature="-55°C ~ 125°C", Supplier Part Number 1=SAM9597-ND, Voltage Rating="675VAC, 954VDC", Applications=-, Category="Connectors, Interconnects", ComponentLink1Description=http://suddendocs.samtec.com/prints/ipl1-1xx-xx-xxx-s-xx-x-xx-mkt.pdf, ComponentLink1URL=http://suddendocs.samtec.com/prints/ipl1-1xx-xx-xxx-s-xx-x-xx-mkt.pdf, Connector Type=Header, Contact Finish - Mating=Gold, Contact Finish - Post=Tin, Contact Finish Thickness - Mating="10µin (0.25µm)", Contact Finish Thickness - Post=-, Contact Length - Mating="0.215\" (5.46mm)", Contact Length - Post="0.085\" (2.16mm)", Contact Material="Phosphor Bronze", Contact Shape=Square, Contact Type="Male Pin", Fastening Type="Locking Ramp", Features=-, Ingress Protection=-, Insulation Height="0.240\" (6.10mm)", Insulation Material="Liquid Crystal Polymer (LCP)", Manufacturer Part Number=IPL1-104-01-L-S-RA-K, Mated Stacking Heights=-, Mounting Type="Through Hole, Right Angle", Number of Positions=4, Number of Positions Loaded=All, Number of Rows=1, Overall Contact Length=-, Packaging=Tube, Part Status=Active, Pitch - Mating="0.100\" (2.54mm)", Pricing 1="1=2.53, 10=2.424, 100=2.02, 500=1.717, 1000=1.4645, 5000=1.313 (USD)", RoHS="RoHS Compliant", Row Spacing - Mating=-, Shrouding="Shrouded - 4 Wall", Stock 1=265, Style="Board to Cable/Wire", Supplier 1=Digi-Key, Termination=Solder
P3 P4: library part "Header 15X2", "Header, 15-Pin, Dual row", Current Rating="5.7A per Contact", Insulation Color=Black, Manufacturer="Samtec Inc.", Material Flammability Rating="UL94 V-0", Operating Temperature="-55°C ~ 125°C", Supplier Part Number 1=SAM10034-ND, Voltage Rating=-, Applications=-, Category="Connectors, Interconnects", ComponentLink1Description=http://suddendocs.samtec.com/prints/ssw-1xx-xx-xxx-x-xx-xxx-xx-mkt.pdf, ComponentLink1URL=http://suddendocs.samtec.com/prints/ssw-1xx-xx-xxx-x-xx-xxx-xx-mkt.pdf, Connector Type=Receptacle, Contact Finish - Mating=Gold, Contact Finish - Post=Tin, Contact Finish Thickness - Mating="3.00µin (0.076µm)", Contact Finish Thickness - Post=-, Contact Length - Post="0.104\" (2.64mm)", Contact Material="Phosphor Bronze", Contact Shape=Square, Contact Type=Forked, Fastening Type=Push-Pull, Features=-, Ingress Protection=-, Insulation Height="0.335\" (8.51mm)", Insulation Material="Liquid Crystal Polymer (LCP)", Manufacturer Part Number=SSW-115-01-F-D, Mated Stacking Heights=-, Mounting Type="Through Hole", Number of Positions=30, Number of Positions Loaded=All, Packaging=Bulk, Part Status=Active, Pitch - Mating="0.100\" (2.54mm)", Pricing 1="1=3.07, 10=2.596, 100=2.006, 500=1.652, 1000=1.534, 5000=1.4455 (USD)", RoHS="RoHS Compliant", Row Spacing - Mating="0.100\" (2.54mm)", Stock 1=119, Style="Board to Board or Cable", Supplier 1=Digi-Key, Termination=Solder
Q1 Q2: library part CMP-1058-00598-1, "P-Channel Power MOSFET, -12 V, -5 A, 43 mOhm, Single, 6-Pin MCPH, Pb-Free, Tape and Reel", Current - Continuous Drain (Id) @ 25°C="5A (Ta)", Drive Voltage (Max Rds On,  Min Rds On)="1.8V, 4.5V", Manufacturer="ON Semiconductor", Operating Temperature="150°C (TJ)", Package / Case="6-SMD, Flat Leads", Power Dissipation (Max)="1.5W (Ta)", Supplier Device Package=SC-88FL/MCPH6, Supplier Part Number 1=MCH6336-TL-EOSCT-ND, Category="Discrete Semiconductor Products", ComponentLink1Description=http://www.onsemi.com/pub/Collateral/MCH6336-D.PDF, ComponentLink1URL=http://www.onsemi.com/pub/Collateral/MCH6336-D.PDF, FET Feature=-, FET Type=P-Channel, Manufacturer Part Number=MCH6336-TL-E, Mounting Type="Surface Mount", Packaging="Cut Tape (CT)", Part Status=Active, Pricing 1="1=0.68, 10=0.569, 100=0.4264, 500=0.3127, 1000=0.24164 (USD)", Rds On (Max) @ Id, Vgs="43 mOhm @ 3A, 4.5V", RoHS="Request Inventory Verification", Stock 1=3000, Supplier 1=Digi-Key, Technology="MOSFET (Metal Oxide)", Vgs (Max)=±10V, Vgs(th) (Max) @ Id="1.4V @ 1mA"
R1 R2: library part CMP-1011-00927-1, "RES SMD 560K OHM 1% 1/10W 0402", Manufacturer="Panasonic Electronic Components", Manufacturer Part Number=ERJ-2RKF5603X, Operating Temperature="-55°C ~ 155°C", Package / Case="0402 (1005 Metric)", Power (Watts)="0.1W, 1/10W", Supplier Device Package=0402, Supplier Part Number 1=P560KLCT-ND, Temperature Coefficient=±100ppm/°C, Tolerance=±1%, Category=Resistors, ComponentLink1Description=https://industrial.panasonic.com/cdbs/www-data/pdf/RDA0000/AOA0000C304.pdf, ComponentLink1URL=https://industrial.panasonic.com/cdbs/www-data/pdf/RDA0000/AOA0000C304.pdf, Composition="Thick Film", Failure Rate=-, Features="Automotive AEC-Q200", Height - Seated (Max)="0.016\" (0.40mm)", Packaging="Cut Tape (CT)", Part Status=Active, Pricing 1="1=0.1, 10=0.056, 100=0.0227, 1000=0.01021, 2500=0.00886, 5000=0.00732 (USD)", RoHS="RoHS Compliant", Size / Dimension="0.039\" L x 0.020\" W (1.00mm x 0.50mm)", Stock 1=193515, Supplier 1=Digi-Key
R3: library part CMP-1013-00017-1, "RES SMD 88.7K OHM 1% 1/8W 0805", Manufacturer="Vishay Dale", Manufacturer Part Number=CRCW080588K7FKEA, Operating Temperature="-55°C ~ 155°C", Package / Case="0805 (2012 Metric)", Power (Watts)="0.125W, 1/8W", Supplier Device Package=0805, Supplier Part Number 1=541-88.7KCDKR-ND, Temperature Coefficient=±100ppm/°C, Tolerance=±1%, Category=Resistors, ComponentLink1Description=http://www.vishay.com/docs/20035/dcrcwe3.pdf, ComponentLink1URL=http://www.vishay.com/docs/20035/dcrcwe3.pdf, Composition="Thick Film", Failure Rate=-, Features="Automotive AEC-Q200", Height - Seated (Max)="0.020\" (0.50mm)", Packaging=Digi-Reel®, Part Status=Active, Pricing 1="1=0.1, 10=0.055, 100=0.0223, 1000=0.01003, 2500=0.0087 (USD)", RoHS="RoHS Compliant", Size / Dimension="0.079\" L x 0.049\" W (2.00mm x 1.25mm)", Stock 1=66, Supplier 1=Digi-Key
R4: library part CMP-1013-00017-1, "RES SMD 22.1K OHM 1% 1/8W 0805", Manufacturer="Vishay Dale", Manufacturer Part Number=CRCW080522K1FKEA, Operating Temperature="-55°C ~ 155°C", Package / Case="0805 (2012 Metric)", Power (Watts)="0.125W, 1/8W", Supplier Device Package=0805, Supplier Part Number 1=541-22.1KCDKR-ND, Temperature Coefficient=±100ppm/°C, Tolerance=±1%, Category=Resistors, ComponentLink1Description=http://www.vishay.com/docs/20035/dcrcwe3.pdf, ComponentLink1URL=http://www.vishay.com/docs/20035/dcrcwe3.pdf, Composition="Thick Film", Failure Rate=-, Features="Automotive AEC-Q200", Height - Seated (Max)="0.020\" (0.50mm)", Packaging=Digi-Reel®, Part Status=Active, Pricing 1="1=0.1, 10=0.055, 100=0.0223, 1000=0.01003, 2500=0.0087 (USD)", RoHS="RoHS Compliant", Size / Dimension="0.079\" L x 0.049\" W (2.00mm x 1.25mm)", Stock 1=1994, Supplier 1=Digi-Key
R7: library part CMP-1013-00017-1, Manufacturer="Vishay Dale", Manufacturer Part Number=CRCW0805280KFKEA, Operating Temperature="-55°C ~ 155°C", Package / Case="0805 (2012 Metric)", Power (Watts)="0.125W, 1/8W", Resistance (Ohms)=280k, Supplier Device Package=0805, Supplier Part Number 1=541-280KCTR-ND, Temperature Coefficient=±100ppm/°C, Tolerance=±1%, Category=Resistors, ComponentLink1Description=http://www.vishay.com/docs/20035/dcrcwe3.pdf, ComponentLink1URL=http://www.vishay.com/docs/20035/dcrcwe3.pdf, Composition="Thick Film", Failure Rate=-, Features="Automotive AEC-Q200", Height - Seated (Max)="0.020\" (0.50mm)", Packaging="Tape & Reel (TR)", Part Status=Active, Pricing 1="5000=0.00546, 10000=0.00474, 25000=0.00417, 50000=0.00382, 125000=0.00375 (USD)", RoHS="RoHS Compliant", Size / Dimension="0.079\" L x 0.049\" W (2.00mm x 1.25mm)", Stock 1=10000, Supplier 1=Digi-Key
R8: library part CMP-1013-00017-1, Manufacturer=Yageo, Manufacturer Part Number=RC0805FR-0710KL, Operating Temperature="-55°C ~ 155°C", Package / Case="0805 (2012 Metric)", Power (Watts)="0.125W, 1/8W", Resistance (Ohms)=10k, Supplier Device Package=0805, Supplier Part Number 1=311-10.0KCRCT-ND, Temperature Coefficient=±100ppm/°C, Tolerance=±1%, Category=Resistors, ComponentLink1Description=http://www.yageo.com/documents/recent/PYu-RC_Group_51_RoHS_L_7.pdf, ComponentLink1URL=http://www.yageo.com/documents/recent/PYu-RC_Group_51_RoHS_L_7.pdf, Composition="Thick Film", Failure Rate=-, Features="Moisture Resistant", Height - Seated (Max)="0.024\" (0.60mm)", Packaging="Cut Tape (CT)", Part Status=Active, Pricing 1="1=0.1, 10=0.022, 100=0.0088, 1000=0.00396, 2500=0.00344 (USD)", RoHS="RoHS Compliant", Size / Dimension="0.079\" L x 0.049\" W (2.00mm x 1.25mm)", Stock 1=13336570, Supplier 1=Digi-Key
R9 R11: library part CMP-1013-00017-1, "Vout = 12.05 ­ (445.7 / 63.1+Ra)"
R10 R13: library part CMP-1013-00017-1, "Vout = 12.05 + (50.96 / 22+Rb)"
R12: library part CMP-1013-00017-1, Case/Package=0805, Case Code (Metric)=2012, Manufacturer=Vishay, Manufacturer Part Number=CRCW0805100KFKEA, Max Operating Temperature=155°C, Min Operating Temperature=-55°C, Package Quantity=5000, Power Rating=125mW, Resistance=100K, Supplier Part Number 1=CRCW0805100KFKEA/BKN, Temperature Coefficient=100ppm/°C, Tolerance=1%, Voltage Rating=150V, Case Code (Imperial)=0805, ComponentLink1Description=https://datasheet.ciiva.com/11809/0900766b80d98b26-11809057.pdf, ComponentLink1URL=https://datasheet.ciiva.com/11809/0900766b80d98b26-11809057.pdf, ComponentLink2Description=https://datasheet.ciiva.com/7777/1697337-7777349.pdf, ComponentLink2URL=https://datasheet.ciiva.com/7777/1697337-7777349.pdf, ComponentLink3Description=https://datasheet.ciiva.com/3258/dcrcwe3-3258006.pdf, ComponentLink3URL=https://datasheet.ciiva.com/3258/dcrcwe3-3258006.pdf, ComponentLink4Description=https://datasheet.ciiva.com/16754/70201119-16754822.pdf, ComponentLink4URL=https://datasheet.ciiva.com/16754/70201119-16754822.pdf, ComponentLink5Description=https://datasheet.ciiva.com/8337/dcrcwe3-8337738.pdf, ComponentLink5URL=https://datasheet.ciiva.com/8337/dcrcwe3-8337738.pdf, ComponentLink6Description=https://datasheet.ciiva.com/16341/dcrcwe3-16341530.pdf, ComponentLink6URL=https://datasheet.ciiva.com/16341/dcrcwe3-16341530.pdf, ComponentLink7Description=https://datasheet.ciiva.com/16852/dcrcwe3-16852810.pdf, ComponentLink7URL=https://datasheet.ciiva.com/16852/dcrcwe3-16852810.pdf, ComponentLink8Description=https://datasheet.ciiva.com/16720/70201119-16720891.pdf, ComponentLink8URL=https://datasheet.ciiva.com/16720/70201119-16720891.pdf, ComponentLink9Description=https://datasheet.ciiva.com/7777/1720486-7777565.pdf, ComponentLink9URL=https://datasheet.ciiva.com/7777/1720486-7777565.pdf, Composition="Thick Film", Contact Plating=Tin, Depth=1.25mm, Height=0.45mm, Lead Free="Lead Free", Length=2mm, Military Standard=Not, Mount="Surface Mount", Number of Pins=2, Packaging="Tape and Reel", Pricing 1="1=0.1, 10=0.049, 25=0.042, 50=0.035, 100=0.028 (USD)", Radiation Hardening=No, REACH SVHC=Unknown, Stock 1=1317, Supplier 1=Avnet, Termination=SMD/SMT, Voltage Rating (DC)=150V, Weight=0.000194oz, Width=1.25mm
R14: library part CMP-1013-00017-1, "RES SMD 100K OHM 1% 1/8W 0805", Case/Package=0805, Case Code (Metric)=2012, Manufacturer=Vishay, Manufacturer Part Number=CRCW0805100KFKEA, Max Operating Temperature=155°C, Min Operating Temperature=-55°C, Package Quantity=5000, Power Rating=125mW, Resistance=100K, Supplier Part Number 1=CRCW0805100KFKEA/BKN, Temperature Coefficient=100ppm/°C, Tolerance=1%, Voltage Rating=150V, Case Code (Imperial)=0805, ComponentLink1Description=https://datasheet.ciiva.com/11809/0900766b80d98b26-11809057.pdf, ComponentLink1URL=https://datasheet.ciiva.com/11809/0900766b80d98b26-11809057.pdf, ComponentLink2Description=https://datasheet.ciiva.com/7777/1697337-7777349.pdf, ComponentLink2URL=https://datasheet.ciiva.com/7777/1697337-7777349.pdf, ComponentLink3Description=https://datasheet.ciiva.com/3258/dcrcwe3-3258006.pdf, ComponentLink3URL=https://datasheet.ciiva.com/3258/dcrcwe3-3258006.pdf, ComponentLink4Description=https://datasheet.ciiva.com/16754/70201119-16754822.pdf, ComponentLink4URL=https://datasheet.ciiva.com/16754/70201119-16754822.pdf, ComponentLink5Description=https://datasheet.ciiva.com/8337/dcrcwe3-8337738.pdf, ComponentLink5URL=https://datasheet.ciiva.com/8337/dcrcwe3-8337738.pdf, ComponentLink6Description=https://datasheet.ciiva.com/16341/dcrcwe3-16341530.pdf, ComponentLink6URL=https://datasheet.ciiva.com/16341/dcrcwe3-16341530.pdf, ComponentLink7Description=https://datasheet.ciiva.com/16852/dcrcwe3-16852810.pdf, ComponentLink7URL=https://datasheet.ciiva.com/16852/dcrcwe3-16852810.pdf, ComponentLink8Description=https://datasheet.ciiva.com/16720/70201119-16720891.pdf, ComponentLink8URL=https://datasheet.ciiva.com/16720/70201119-16720891.pdf, ComponentLink9Description=https://datasheet.ciiva.com/7777/1720486-7777565.pdf, ComponentLink9URL=https://datasheet.ciiva.com/7777/1720486-7777565.pdf, Composition="Thick Film", Contact Plating=Tin, Depth=1.25mm, Height=0.45mm, Lead Free="Lead Free", Length=2mm, Military Standard=Not, Mount="Surface Mount", Number of Pins=2, Packaging="Tape and Reel", Pricing 1="1=0.1, 10=0.049, 25=0.042, 50=0.035, 100=0.028 (USD)", Radiation Hardening=No, REACH SVHC=Unknown, Stock 1=1317, Supplier 1=Avnet, Termination=SMD/SMT, Voltage Rating (DC)=150V, Weight=0.000194oz, Width=1.25mm
U1 U2: library part CMP-0479-00214-1, "Low Loss PowerPath Controller for Large PFET, 3 to 36 V Vin, 8-pin SOP (MS8-8), -40 to 85 degC, Pb-Free, Tape and Reel", Base Part Number=LTC4414, Current - Output (Max)=-, Manufacturer="Linear Technology/Analog Devices", Manufacturer Part Number=LTC4414EMS8#PBF, Operating Temperature="-40°C ~ 85°C", Package / Case="8-TSSOP, 8-MSOP (0.118\", 3.00mm Width)", Supplier Device Package=8-MSOP, Supplier Part Number 1=LTC4414EMS8#PBF-ND, Voltage - Supply="3 V ~ 36 V", Applications="Battery Backup, Industrial/Automotive, High Current Switch", Category="Integrated Circuits (ICs)", ComponentLink1Description=http://www.linear.com/docs/9037, ComponentLink1URL=http://www.linear.com/docs/9037, FET Type=P-Channel, Internal Switch(s)=No, Mounting Type="Surface Mount", Packaging=Tube, Part Status=Active, Pricing 1="1=3.79, 25=2.6928, 100=2.2236 (USD)", Ratio - Input:Output=2:1, RoHS="RoHS Compliant", Stock 1=414, Supplier 1=Digi-Key, Type="Source Selector Switch"
U3: library part CMP-0394-00528-2, "Single Output LDO, 300 mA, Fixed 3.3 V Output, 2 to 5.5 V Input, with Low IQ, 5-pin SOT-23 (DBV), -40 to 125 degC, Green (RoHS & no Sb/Br)", Base Part Number=TLV70233, Current - Output=300mA, Manufacturer="Texas Instruments", Operating Temperature="-40°C ~ 125°C", Package / Case="SC-74A, SOT-753", Supplier Device Package=SOT-23-5, Supplier Part Number 1=296-32415-1-ND, Voltage - Input (Max)=5.5V, Voltage - Output (Max)=-, Voltage - Output (Min/Fixed)=3.3V, Voltage Dropout (Max)="0.38V @ 300mA", Category="Integrated Circuits (ICs)", ComponentLink1Description=http://www.ti.com/lit/ds/symlink/tlv702.pdf, ComponentLink1URL=http://www.ti.com/lit/ds/symlink/tlv702.pdf, Control Features=Enable, Manufacturer Part Number=TLV70233DBVR, Mounting Type="Surface Mount", Output Configuration=Positive, Output Type=Fixed, Packaging="Cut Tape (CT)", Part Status=Active, Pricing 1="1=0.51, 10=0.44, 100=0.3288, 500=0.25832, 1000=0.19961 (USD)", Protection Features="Over Current, Over Temperature, Reverse Polarity, Under Voltage Lockout (UVLO)", PSRR="68dB (1kHz)", RoHS="RoHS Compliant", Stock 1=65852, Supplier 1=Digi-Key
U4: "IC REG SWTCHD CAP INV 6SOT23", Current - Output=200mA, Frequency - Switching=2MHz, Manufacturer="Texas Instruments", Operating Temperature="-40°C ~ 85°C (TA)", Package / Case=SOT-23-6, Supplier Part Number 1=296-43957-6-ND, Voltage - Input (Max)=5.5V, Voltage - Input (Min)=2.7V, Voltage - Output (Max)=-, Voltage - Output (Min/Fixed)=-Vin, Category="Integrated Circuits (ICs)", ComponentLink1Description=http://www.ti.com/lit/ds/symlink/lm2776.pdf, ComponentLink1URL=http://www.ti.com/lit/ds/symlink/lm2776.pdf, Function=Ratiometric, Manufacturer Part Number=LM2776DBVR, Mounting Type="Surface Mount", Number of Outputs=1, Output Configuration=Negative, Output Type=Fixed, Packaging=Digi-Reel®, Part Status=Active, Pricing 1="1=1.05, 10=0.936, 100=0.7297, 500=0.60276, 1000=0.47586 (USD)", RoHS="RoHS Compliant", Stock 1=13045, Supplier 1=Digi-Key, Supplier Device Package=SOT-23-6, Synchronous Rectifier=No, Topology="Charge Pump"
U5: library part LMR23625CDDAR, "IC REG BUCK ADJ 2.5A SYNC 8SOPWR", Current - Output=2.5A, Frequency - Switching=2.1MHz, Manufacturer="Texas Instruments", Operating Temperature="-40°C ~ 125°C (TJ)", Package / Case="8-PowerSOIC (0.154\", 3.90mm Width)", Supplier Device Package="8-SO PowerPad", Supplier Part Number 1=296-47269-1-ND, Voltage - Input (Max)=36V, Voltage - Input (Min)=4.5V, Voltage - Output (Max)=28V, Voltage - Output (Min/Fixed)=1V, Category="Integrated Circuits (ICs)", ComponentLink1Description=http://www.ti.com/lit/ds/symlink/lmr23625.pdf, ComponentLink1URL=http://www.ti.com/lit/ds/symlink/lmr23625.pdf, Function=Step-Down, Manufacturer Part Number=LMR23625CFDDAR, Mounting Type="Surface Mount", Number of Outputs=1, Output Configuration=Positive, Output Type=Adjustable, Packaging="Cut Tape (CT)", Part Status=Active, Pricing 1="1=3.24, 10=2.912, 100=2.3861, 500=2.03124, 1000=1.7131 (USD)", RoHS="RoHS Compliant", Stock 1=2378, Supplier 1=Digi-Key, Synchronous Rectifier=Yes, Topology=Buck
U7: library part CMP-0491-01698-1, "IC REG BOOST ADJ 0.3A TSOT23-6", Current - Output="300mA (Switch)", Frequency - Switching=3MHz, Manufacturer 1="Linear Technology", Manufacturer Part Number 1=LT3461AES6#TRMPBF, Operating Temperature="0°C ~ 70°C (TA)", Package / Case="SOT-23-6 Thin, TSOT-23-6", Supplier Device Package=TSOT-23-6, Supplier Part Number 1=LT3461AES6#TRMPBFCT-ND, Voltage - Input (Max)=16V, Voltage - Input (Min)=2.5V, Voltage - Output (Max)=38V, Voltage - Output (Min/Fixed)=1.255V, Category 1="Integrated Circuits (ICs)", ComponentLink1Description=http://www.linear.com/docs/3469, ComponentLink1URL=http://www.linear.com/docs/3469, Description 1="IC REG BOOST ADJ 0.3A TSOT23-6", Function=Step-Up, Mounting Type="Surface Mount", Number of Outputs=1, Output Configuration=Positive, Output Type=Adjustable, Packaging="Cut Tape (CT)", Part Status=Active, Pricing 1="1=3.94, 25=3.52, 100=2.4, 250=2.2 (USD)", RoHS 1="RoHS Compliant", Stock 1=1325, Supplier 1=Digi-Key, Synchronous Rectifier=No, Topology=Boost